# Altium PCB TripsQuad.PcbDoc
Units mil, origin at the board's own origin, x right, y up, seen from the top; angles counter-clockwise.
Board outline 2283.46 x 4370.08 mil, 2 copper layers (Top Layer, Bottom Layer); 95 components, 55 nets, 267 pads, 52 vias.
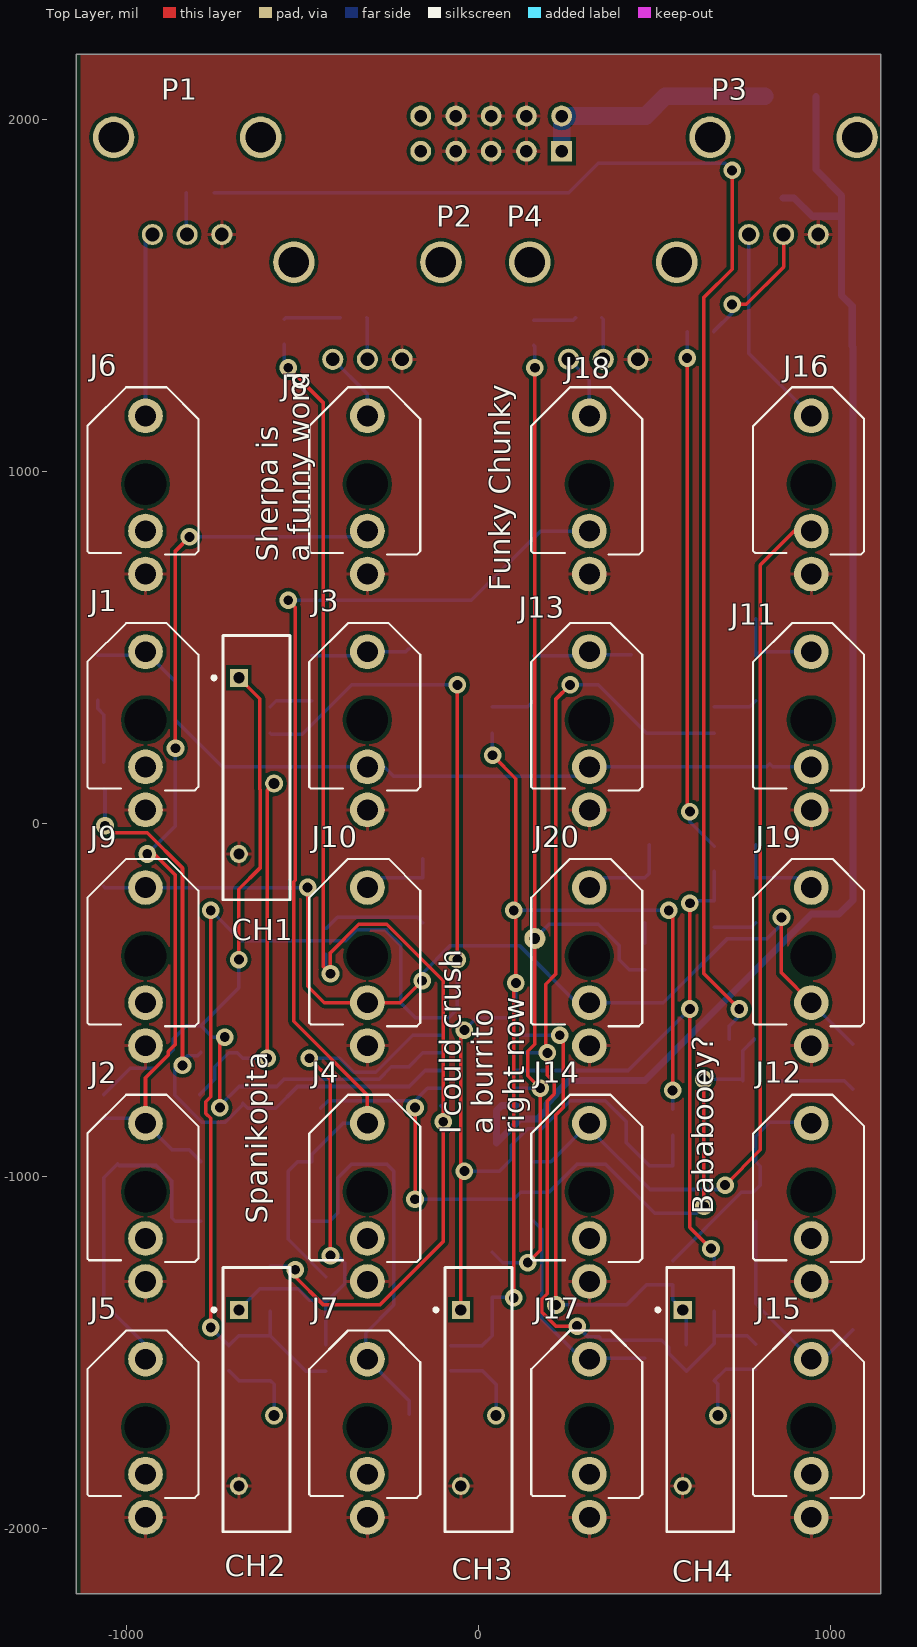
[diagram p0: Top Layer view]
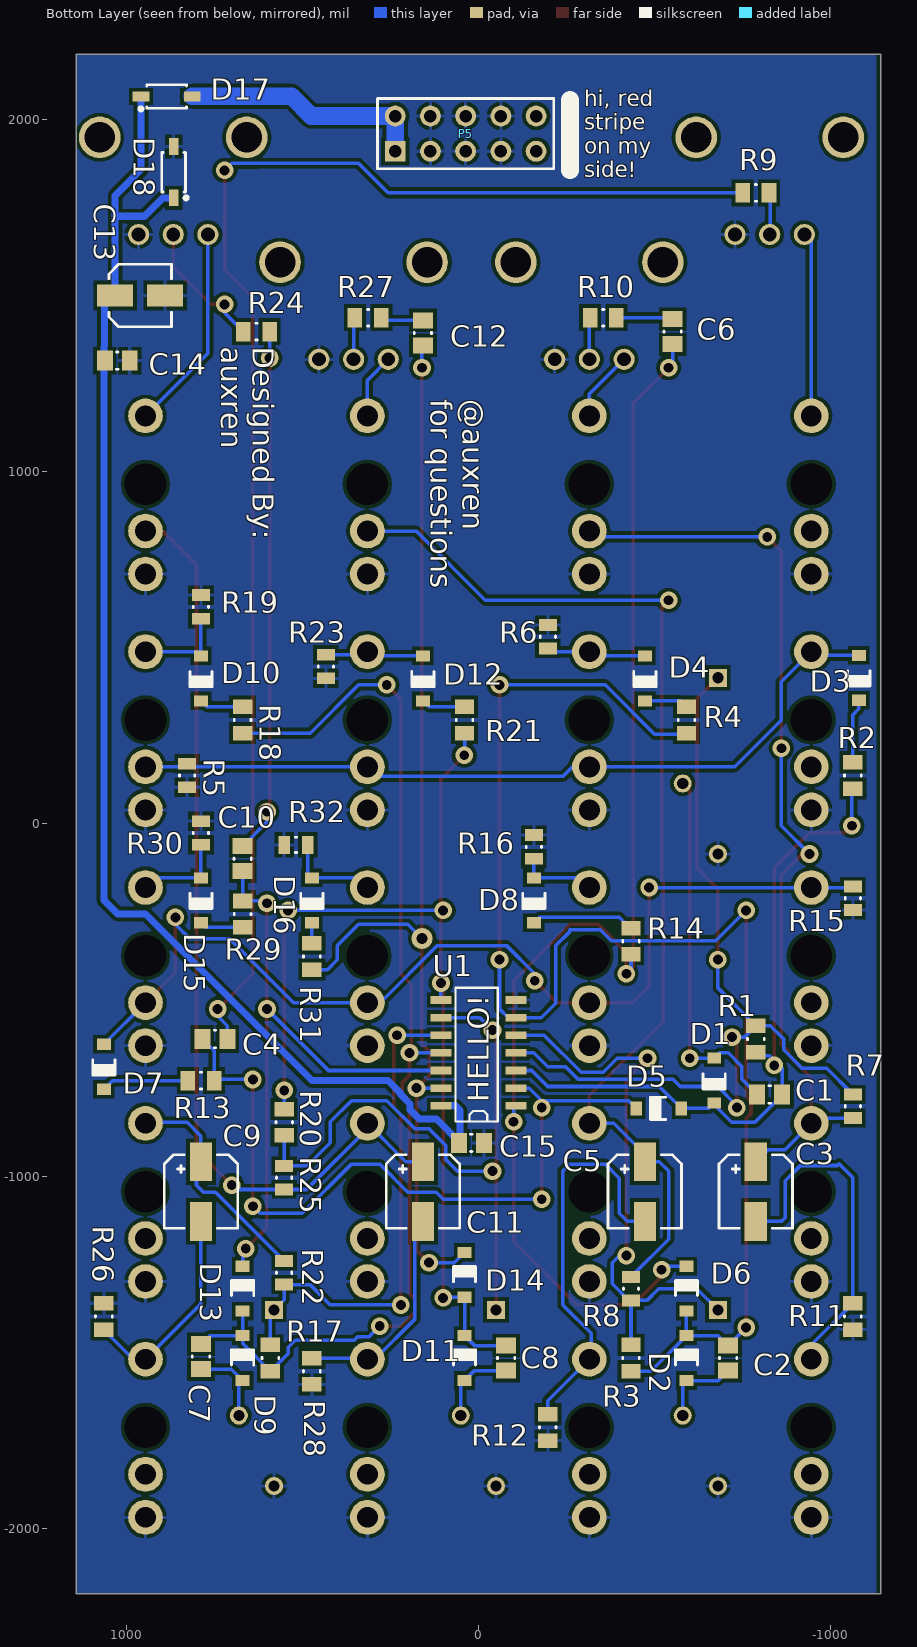
[diagram p1: Bottom Layer view, seen from below]

## Layer stack, top to bottom
Top Solder: solder mask 0.4, Solder Resist, Dk 3.5
Top Layer: signal copper 1.4
Dielectric 1: dielectric 12.6, FR-4, Dk 4.8
Bottom Layer: signal copper 1.4
Bottom Solder: solder mask 0.4, Solder Resist, Dk 3.5

## Board outline
-1141.73,-2185.04 -1141.73,2185.04 1141.73,2185.04 1141.73,-2185.04

## Design rules (kind name [scope] priority, off if disabled: settings)
Clearance [All] p1: gap=10
PolygonConnect [All] p1: connectstyle=Relief reliefconductorwidth=10 reliefentries=4 polygonreliefangle="90 Angle" airgapwidth=10
RoutingVias [All] p1: holewidth=28 width=50 viastyle="Through Hole" minholewidth=28 minwidth=50 maxholewidth=28 maxwidth=50
SolderMaskExpansion [All] p1: expansion=4
Width [All] p1: maxlimit=50 minlimit=10 preferedwidth=10
30 further rules are at their usual default settings.

## Components (designator, comment, footprint, x,y, rotation, side; value= is the part's Value field where it differs from the comment)
C1 "100pF" CAPC0805(2012)75_N -826.77,-767.72 r0 bottom
C2 "100pF" CAPC0805(2012)75_N -708.66,-1515.75 r270 bottom
C3 "47uF" PNSC-FT-V-53x53-2_V -787.4,-1043.31 r180 bottom
C4 "470nF" CAPC0805(2012)75_N 748.03,-610.24 r0 bottom
C5 "47uF" PNSC-FT-V-53x53-2_V -472.44,-1043.31 r180 bottom
C6 "470nF" CAPC0805(2012)75_N -551.18,1397.64 r270 bottom
C7 "100pF" CAPC0805(2012)75_N 787.4,-1511.81 r270 bottom
C8 "100pF" CAPC0805(2012)75_N -78.74,-1515.75 r270 bottom
C9 "47uF" PNSC-FT-V-53x53-2_V 787.4,-1043.31 r180 bottom
C10 "470nF" CAPC0805(2012)75_N 669.29,-98.43 r270 bottom
C11 "47uF" PNSC-FT-V-53x53-2_V 157.48,-1043.31 r180 bottom
C12 "470nF" CAPC0805(2012)75_N 157.48,1393.7 r270 bottom
C13 "10uF" NIC-CAPA2-4X5.8_V 960,1500 r180 bottom
C14 "100nF" CAPC0805(2012)75_N 1025,1315 r0 bottom
C15 "CAP 100nF 6.3V 0805(2012)" CAPC0805(2012)100_N 20.16,-905.04 r0 bottom
CH1 "20k" BOUR-3006P-3_V -629.84,160.04 r270 top (schematic designator VR1)
CH2 "20k" BOUR-3006P-3_V -629.92,-1633.86 r270 top (schematic designator VR2)
CH3 "20k" BOUR-3006P-3_V 0,-1633.86 r270 top (schematic designator VR4)
CH4 "20k" BOUR-3006P-3_V 629.92,-1633.86 r270 top (schematic designator VR3)
D1 "1N4148W" JSCJ-SOD-123-2_V -669.29,-728.35 r270 bottom
D2 "1N4148W" JSCJ-SOD-123-2_V -590.55,-1515.75 r90 bottom
D3 "1N4148W" JSCJ-SOD-123-2_V -1079.84,414.96 r270 bottom
D4 "1N4148W" JSCJ-SOD-123-2_V -472.44,413.39 r270 bottom
D5 "1N4148W" JSCJ-SOD-123-2_V -511.81,-807.09 r0 bottom
D6 "1N4148W" JSCJ-SOD-123-2_V -590.55,-1318.9 r90 bottom
D7 "1N4148W" JSCJ-SOD-123-2_V 1062.99,-688.98 r270 bottom
D8 "1N4148W" JSCJ-SOD-123-2_V -157.48,-216.54 r270 bottom
D9 "1N4148W" JSCJ-SOD-123-2_V 669.29,-1515.75 r90 bottom
D10 "1N4148W" JSCJ-SOD-123-2_V 787.4,413.39 r270 bottom
D11 "1N4148W" JSCJ-SOD-123-2_V 39.37,-1515.75 r90 bottom
D12 "1N4148W" JSCJ-SOD-123-2_V 157.48,413.39 r270 bottom
D13 "1N4148W" JSCJ-SOD-123-2_V 669.29,-1318.9 r90 bottom
D14 "1N4148W" JSCJ-SOD-123-2_V 39.37,-1279.53 r90 bottom
D15 "1N4148W" JSCJ-SOD-123-2_V 787.4,-216.54 r270 bottom
D16 "1N4148W" JSCJ-SOD-123-2_V 472.44,-216.54 r270 bottom
D17 "1N5819HW-7-F" DIOD-SOD-123-2_V 885,2065 r0 bottom
D18 "1N5819HW-7-F" DIOD-SOD-123-2_V 865,1850 r270 bottom
J1 "Thonkicon jack" "Thonkiconn Pot PJ301M" -944.88,295.28 r0 top
J2 "Thonkicon jack" "Thonkiconn Pot PJ301M" -944.88,-1043.31 r0 top
J3 "Thonkicon jack" "Thonkiconn Pot PJ301M" -314.96,295.28 r0 top
J4 "Thonkicon jack" "Thonkiconn Pot PJ301M" -314.96,-1043.31 r0 top
J5 "Thonkicon jack" "Thonkiconn Pot PJ301M" -944.88,-1712.6 r0 top
J6 "Thonkicon jack" "Thonkiconn Pot PJ301M" -944.88,964.57 r0 top
J7 "Thonkicon jack" "Thonkiconn Pot PJ301M" -314.96,-1712.6 r0 top
J8 "Thonkicon jack" "Thonkiconn Pot PJ301M" -314.96,964.57 r0 top
J9 "Thonkicon jack" "Thonkiconn Pot PJ301M" -944.88,-374.02 r0 top
J10 "Thonkicon jack" "Thonkiconn Pot PJ301M" -314.96,-374.02 r0 top
J11 "Thonkicon jack" "Thonkiconn Pot PJ301M" 944.88,295.28 r0 top
J12 "Thonkicon jack" "Thonkiconn Pot PJ301M" 944.88,-1043.31 r0 top
J13 "Thonkicon jack" "Thonkiconn Pot PJ301M" 314.96,295.28 r0 top
J14 "Thonkicon jack" "Thonkiconn Pot PJ301M" 314.96,-1043.31 r0 top
J15 "Thonkicon jack" "Thonkiconn Pot PJ301M" 944.88,-1712.6 r0 top
J16 "Thonkicon jack" "Thonkiconn Pot PJ301M" 944.88,964.57 r0 top
J17 "Thonkicon jack" "Thonkiconn Pot PJ301M" 314.96,-1712.6 r0 top
J18 "Thonkicon jack" "Thonkiconn Pot PJ301M" 314.96,964.57 r0 top
J19 "Thonkicon jack" "Thonkiconn Pot PJ301M" 944.88,-374.02 r0 top
J20 "Thonkicon jack" "Thonkiconn Pot PJ301M" 314.96,-374.02 r0 top
P1 "Song Huei marker Pot" SonGueiPot -826.77,1948.82 r0 top
P2 "Song Huei marker Pot" SonGueiPot -314.96,1594.49 r0 top
P3 "Song Huei marker Pot" SonGueiPot 866.14,1948.82 r0 top
P4 "Song Huei marker Pot" SonGueiPot 354.33,1594.49 r0 top
P5 "Header 5X2" HDR2X5 236.22,1909.45 r180 bottom
R1 "1M5" RESC0805(2012)_N -787.4,-610.24 r90 bottom
R2 "1M5" RESC0805(2012)_N -1062.99,137.8 r270 bottom
R3 "1M5" RESC0805(2012)_N -433.07,-1515.75 r90 bottom
R4 "1M5" RESC0805(2012)_N -590.55,295.28 r270 bottom
R5 "100K" RESC0805(2012)_L 826.77,137.8 r90 bottom
R6 "100K" RESC0805(2012)_L -196.85,531.5 r270 bottom
R7 "330R" RESC0805(2012)_L -1062.99,-801.18 r270 bottom
R8 "330R" RESC0805(2012)_L -433.07,-1318.9 r90 bottom
R9 "220K" RESC0805(2012)_N -787.4,1791.34 r0 bottom
R10 "220K" RESC0805(2012)_N -354.33,1437.01 r180 bottom
R11 "150K" RESC0805(2012)_N -1062.99,-1397.64 r90 bottom
R12 "150K" RESC0805(2012)_N -196.85,-1712.6 r90 bottom
R13 "1M5" RESC0805(2012)_N 787.4,-728.35 r180 bottom
R14 "1M5" RESC0805(2012)_N -433.07,-332.68 r270 bottom
R15 "100K" RESC0805(2012)_L -1062.99,-210.63 r90 bottom
R16 "100K" RESC0805(2012)_L -157.48,-64.96 r270 bottom
R17 "1M5" RESC0805(2012)_N 590.55,-1515.75 r90 bottom
R18 "1M5" RESC0805(2012)_N 669.29,295.28 r270 bottom
R19 "100K" RESC0805(2012)_L 787.4,616.14 r270 bottom
R20 "1M5" RESC0805(2012)_N 551.18,-846.46 r270 bottom
R21 "1M5" RESC0805(2012)_N 39.37,295.28 r270 bottom
R22 "330R" RESC0805(2012)_L 551.18,-1273.62 r90 bottom
R23 "100K" RESC0805(2012)_L 433.07,446.85 r90 bottom
R24 "220K" RESC0805(2012)_N 629.92,1397.64 r180 bottom
R25 "330R" RESC0805(2012)_L 551.18,-1003.94 r270 bottom
R26 "150K" RESC0805(2012)_N 1062.99,-1397.64 r270 bottom
R27 "220K" RESC0805(2012)_N 312.99,1437.01 r180 bottom
R28 "150K" RESC0805(2012)_N 472.44,-1553.15 r90 bottom
R29 "1M5" RESC0805(2012)_N 669.29,-255.91 r90 bottom
R30 "100K" RESC0805(2012)_L 787.4,-25.59 r270 bottom
R31 "1M5" RESC0805(2012)_N 472.44,-375.98 r270 bottom
R32 "100K" RESC0805(2012)_L 517.72,-59.06 r180 bottom
U1 "LM3900" LM3900 0,-649.61 r90 bottom

## Footprints (in the part's own frame and the unit in brackets; to place one, negate y for a bottom-side part, rotate by r counter-clockwise, add the part's x,y. Pads: shape width x height; smd on the part's side, far side on the other; paste and mask are expansions set on the pad)
BOUR-3006P-3_V [mm] "THD, 3-Leads, Body 19.05x4.83mm, Height 6.6mm"
  rect 1.3x1.3 hole 0.8: 1(-6.475,-1.27)
  round 1.3 hole 0.8: 2(1.145,1.27) 3(6.225,-1.27)
  silkscreen extent -9.53,-3.19 9.53,2.41, body extent -9.53,-2.41 11.05,2.41, height 6.6
CAPC0805(2012)75_N [mm] "Chip Capacitor, Body 2.0x1.2mm, Height 0.75mm, IPC Medium Density"
  rect 1.15x1.45 smd: 1(-0.9,0) 2(0.9,0)
  silkscreen extent -0.05,-0.62 0.05,0.63, body extent -1.1,-0.72 1.1,0.73, height 0.75
CAPC0805(2012)100_N [mm] "Chip Capacitor, Body 2.0x1.2mm, Height 1.0mm, IPC Medium Density"
  rect 1.15x1.45 smd: 1(-0.9,0) 2(0.9,0)
  silkscreen extent -0.05,-0.62 0.05,0.63, body extent -1.1,-0.72 1.1,0.73, height 1
DIOD-SOD-123-2_V [mm] "SOD-123, 2-Leads, Body 2.85x1.7mm (max), Pitch 3.7mm"
  rect 1.2x0.7 smd: 1(-1.85,0) 2(1.85,0)
  silkscreen extent -1.43,-0.85 1.97,1.02, body extent -1.42,-0.85 1.43,0.85, height 1.45
HDR2X5 [mm] "Connector; Header; 5x2 Position"
  rect 1.5x1.5 hole 0.9: 1(0,0)
  round 1.5 hole 0.9: 2(0,2.54) 3(2.54,0) 4(2.54,2.54) 5(5.08,0) 6(5.08,2.54) 7(7.62,0) 8(7.62,2.54) 9(10.16,0) 10(10.16,2.54)
  silkscreen extent -1.27,-1.27 11.43,3.81
JSCJ-SOD-123-2_V [mm] "SMD, 2-Leads, Body 2.7x1.6mm, Height 1.25mm"
  rect 0.8x1 smd: 1(-1.62,0) 2(1.62,0)
  silkscreen extent -0.5,-0.8 0.6,0.8, body extent -1.35,-0.8 1.35,0.8, height 1.25
LM3900 [mm] "LM3900 SOIC"
  rect 0.55x1.5 smd: 1(-3.81,-2.7) 2(-2.54,-2.7) 3(-1.27,-2.7) 4(0,-2.7) 5(1.27,-2.7) 6(2.54,-2.7) 7(3.81,-2.7) 8(3.81,2.7) 9(2.54,2.7) 10(1.27,2.7) 11(0,2.7) 12(-1.27,2.7) 13(-2.54,2.7) 14(-3.81,2.7)
  silkscreen extent -4.95,-1.4 4.7,1.65
NIC-CAPA2-4X5.8_V [mm] "Aluminum Electrolytic Capacitor, Diameter 4mm, Height 6.1mm, Pitch 3.6mm"
  rect 2.6x1.6 smd: 1(-1.8,0) 2(1.8,0)
  silkscreen extent -2.25,-2.25 2.25,2.25, body extent -2,-2 2,2, height 6.1
PNSC-FT-V-53x53-2_V [mm] "SMD, 2-Leads, Body 5.3x5.3mm, Height 6.1mm"
  rect 1.6x2.8 smd: 1(0,2.15) 2(0,-2.15)
  silkscreen extent -2.65,-2.65 2.65,2.65, body extent -2.65,-2.95 2.65,2.95, height 6.1
RESC0805(2012)_L [mm] "Chip Resistor, Body 2.0x1.3mm, IPC High Density"
  rect 0.85x1.3 smd: 1(-0.85,0) 2(0.85,0)
  silkscreen extent -0.05,-0.55 0.05,0.55, body extent -1.1,-0.67 1.1,0.68, height 0.7
RESC0805(2012)_N [mm] "Chip Resistor, Body 2.0x1.3mm, IPC Medium Density"
  rect 1.05x1.4 smd: 1(-0.95,0) 2(0.95,0)
  silkscreen extent -0.05,-0.6 0.05,0.6, body extent -1.1,-0.67 1.1,0.68, height 0.7
SonGueiPot [mm]
  round 3 hole 2.2: 0(-5.3,0) 0(5.3,0)
  round 1.524 hole 1: 1(-2.5,-7) 2(0,-7) 3(2.5,-7)
  body extent -6.05,-7.14 6.05,5.36, height 22.5
"Thonkiconn Pot PJ301M" [mm] "PJ301 Thonkicon Jack from Thonk"
  round 1.524 hole 3: 0(0,0)
  round 2.5 hole 1.5: 1(0,-6.48) 2(0,-3.38) 3(0,4.92)
  silkscreen extent -4.19,-5.08 3.81,6.98, body extent -4.19,-5.08 3.81,6.98, height 9

## Part data
C1 C2 C4 C6 C7 C8 C10 C12 C14: library part CMP-1036-00012-1, "CAP 0.5pF 25V ±0.1pF 0805 (2012 Metric) Thickness 0.75mm SMD"
C3 C5 C9 C11: library part CMP-0744-00003-1, "Aluminum Electrolytic Capacitor, 47 uF +/- 20%, 25 V, -55 to 105 degC, 2-Pin 5.3 x 5.3 x 6.1 mm SMD, RoHS, Tape and Reel"
C13: library part CMP-0687-00016-1, "Aluminum Electrolytic Capacitor, UD Series, Low Impedance, 10 uF, 25 V, + / - 20%, -55 to 105 degC, Chip Type, 4 x 5.8 mm D x L, Pb-Free, Reel"
C15: library part CMP-1036-04391-1, "CAP 100nF 6.3V ±10% 0805 (2012 Metric) Thickness 1mm SMD"
CH1 CH2 CH3 CH4: library part CMP-0972-00009-1, "Trimming Potentiometer, 5K Ohm +/- 10%, -55 to 125 degC, 3-Pin 19.05 x 4.83 x 6.6 mm THD, Transparent Housing, RoHS"
D1 D2 D3 D4 D5 D6 D7 D8 D9 D10 D11 D12 D13 D14 D15 D16: library part CMP-0914-00001-1, "Fast Switching Diode, 75 V, 150 mA, 2-Pin 2.7 x 1.6 x 1.25 mm SMD, Tape and Reel"
D17 D18: library part CMP-0303-00003-1, "1.0 A Surface Mount Schottky Barrier Rectifier, 40 V, -65 to 125 degC, 2-Pin SOD-123 Package, RoHS, Tape and Reel"
P5: "Header, 5-Pin, Dual row"
R1 R2 R3 R4 R13 R14 R17 R18 R20 R21 R29 R31: library part CMP-1013-00150-1, "1M5 0.125W 5% 0805 (2012 Metric)  SMD"
R5 R6 R15 R16 R19 R23 R30 R32: library part CMP-1013-00122-1, "100K 0.125W 5% 0805 (2012 Metric)  SMD"
R7 R8 R22 R25: library part CMP-1013-00062-1, "330R 0.125W 5% 0805 (2012 Metric)  SMD"
R9 R10 R24 R27: library part CMP-1013-00130-1, "220K 0.125W 5% 0805 (2012 Metric)  SMD"
R11 R12 R26 R28: library part CMP-1013-00126-1, "150K 0.125W 5% 0805 (2012 Metric)  SMD"

## Free pads (board coordinates)
  round 60 hole 30: 2(160.16,-325.04)

## Via types
v1: diameter 50, hole 28, Top Layer to Bottom Layer, tented both sides, 52 vias

## Nets (pads, with @x,y where several pads share a name; then routed paths per layer and width w, separated by ;. In a path a pad name is that pad's centre, name@x,y a point inside that pad or via, vN(x,y) a via of type N, cw(c..) or ccw(c..) an arc to the next point about the centre after c; other vN are vias at no path point)
+12V: D17.1 P5.1 P5.2 | length 699
  Bottom Layer w50: P5.1 P5.2 474.45,2009.45 530,2065 D17.1
GND: C13.2 C14.1 C15.1 CH1.3 CH2.3 CH3.3 CH4.3 D18.1 J1.1 J2.1 J3.1 J4.1 J5.1 J6.1 J7.1 J8.1 J9.1 J10.1 J11.1 J12.1 J13.1 J14.1 J15.1 J16.1 J17.1 J18.1 J19.1 J20.1 P1.3 P2.3 P3.3 P4.3 P5.3 P5.4 P5.5 P5.6 P5.7 P5.8 R5.1 R6.1 R11.1 R12.1 R15.1 R16.1 R19.1 R23.1 R26.1 R28.1 R30.1 R32.1 U1.7
NetC1_1: C1.1 D1.2 D5.1 R1.1 R2.2 U1.3 | length 1970.4
  Top Layer w10: v1(-1059.84,-5.04) -1039.84,-25.04 -939.84,-25.04 -839.84,-125.04 v1(-839.84,-685.04)
  Bottom Layer w10: R2.2 -1059.84,97.24 v1(-1059.84,-5.04) ; R1.1 -797.24,-657.48 -826.77,-657.48 -862.2,-692.91 C1.1 -862.2,-769.24 -784.99,-846.46 -718.55,-846.46 -669.29,-797.2 D1.2 -654.33,-807.09 D5.1 -513.54,-745.04 -196.34,-745.04 -150.91,-699.61 U1.3
NetC1_2: C1.2 CH1.2 D1.1 | length 1045.5
  Top Layer w10: v1(-599.84,-665.04) -599.84,94.96 CH1.2
  Bottom Layer w10: C1.2 -748.03,-724.41 -748.03,-688.98 -708.66,-649.61 -684.25,-649.61 D1.1 v1@-610.04,-664.57
NetC2_1: C2.1 D2.2 D6.1 R3.1 R4.2 U1.6 | length 4132
  Top Layer w10: v1(-759.84,-1429.13) -759.84,-835.47 -773.7,-821.61 -773.7,-788.47 -759.84,-774.61 v1(-759.84,-245.04) ; v1(-59.84,-385.04) v1(-59.84,394.96)
  Bottom Layer w10: v1(-759.84,-1429.13) C2.1 -680.31,-1451.97 D2.2 ; v1(-759.84,-245.04) -673.94,-330.94 -376.62,-330.94 -345.64,-299.96 -259.84,-299.96 ; D6.1 D2.2 ; R4.2 -587.64,254.96 -499.84,254.96 -359.84,394.96 v1(-59.84,394.96) ; R3.1 -489.37,-1553.15 D2.2 ; -259.84,-305.04 -219.84,-345.04 -219.84,-508.5 -178.74,-549.61 U1.6 -84.41,-549.61 -59.84,-525.04 v1(-59.84,-385.04)
NetC2_2: C2.2 CH2.2 D2.1 | length 233.7
  Bottom Layer w10: C2.2 -680.32,-1579.53 D2.1 -579.92,-1590.16 CH2.2
NetC3_1: C3.1 J2.3 J8.2 R7.2 | length 2633
  Top Layer w10: J2.3 -944.88,-719.94 -880.67,-655.73 -880.67,-645.87 -859.84,-625.04 -859.84,-145.04 -919.84,-85.04 v1(-939.84,-85.04) ; v1(-859.84,214.96) -859.84,774.96 v1(-819.84,814.96)
  Bottom Layer w10: R7.2 -959.84,-834.65 J2.3 -869.29,-925.2 -820.87,-925.2 C3.1 ; v1(-939.84,-85.04) -859.84,-5.04 v1(-859.84,214.96) ; v1(-819.84,814.96) -331.5,814.96 J8.2
NetC3_2: C3.2 J5.3 R11.2 | length 984.8
  Bottom Layer w10: J5.3 -944.88,-1478.35 R11.2 -1062.99,-1003.94 -1023.62,-964.57 -1018.94,-969.25 -914.21,-969.25 -870.83,-1012.63 -870.83,-1117.36 -860.24,-1127.95 C3.2
NetC4_1: C4.1 R9.2 | length 4064.4
  Top Layer w10: v1(720.16,1854.96) 720.16,1574.96 640.16,1494.96 640.16,-425.04 v1(740.16,-525.04)
  Bottom Layer w10: R9.2 256.54,1791.34 340.16,1874.96 626.61,1874.96 626.81,1874.76 688.15,1874.76 688.35,1874.96 700.16,1874.96 v1(720.16,1854.96) ; C4.1 712.6,-572.6 740.16,-545.04 v1(740.16,-525.04)
NetC4_2: C4.2 D5.2 R13.2 U1.2 | length 2156.4
  Top Layer w10: v1(-179.84,-1065.04) v1(-179.84,-805.04) ; v1(640.16,-1085.04) v1(640.16,-725.04)
  Bottom Layer w10: D5.2 -425.98,-785.04 -179.84,-785.04 -144.41,-749.61 U1.2 ; v1(-179.84,-1065.04) 100.16,-1065.04 120.16,-1045.04 200.16,-1045.04 280.16,-965.04 360.16,-965.04 500.16,-1105.04 620.16,-1105.04 v1(640.16,-1085.04) ; v1(640.16,-725.04) 746.69,-725.04 R13.2 750.24,-728.11 750.24,-643.46 C4.2
NetC5_1: C5.1 J4.3 J18.2 R8.2 | length 3155.8
  Top Layer w10: v1(-539.84,634.96) -519.84,614.96 -519.84,-159.02 -524.57,-163.75 -524.57,-560.31 -314.96,-769.92 J4.3
  Bottom Layer w10: v1(-539.84,634.96) -19.84,634.96 176.69,831.5 J18.2 ; R8.2 -539.84,-1178.66 -539.84,-985.04 -513.46,-958.66 C5.1 -472.44,-937.64 -384.41,-849.61 J4.3
NetC5_2: C5.2 J7.3 R12.2 | length 1141.2
  Bottom Layer w10: C5.2 -422.76,-1127.95 -399.84,-1105.04 -399.84,-1005.04 -359.84,-965.04 -259.84,-965.04 -239.84,-985.04 -239.84,-1365.04 -319.84,-1445.04 -319.84,-1514.02 J7.3 -196.85,-1637.01 R12.2
NetC6_1: C6.1 R10.2 | length 161.1
  Bottom Layer w10: C6.1 -547.24,1437.01 R10.2
NetC6_2: C6.2 D6.2 R14.2 U1.1 | length 3792.1
  Top Layer w10: v1(-539.84,1294.96) -439.84,1194.96 -439.84,-405.04 v1(-419.84,-425.04) -419.84,-365.04 -339.84,-285.04 -259.84,-285.04 -99.84,-445.04 v1(-99.84,-845.04) -99.84,-1185.04 -279.84,-1365.04 -439.84,-1365.04 -519.84,-1285.04 v1(-519.84,-1265.04)
  Bottom Layer w10: D6.2 -529.76,-1255.12 v1(-519.84,-1265.04) ; C6.2 -551.18,1306.3 v1(-539.84,1294.96) ; R14.2 -433.07,-411.81 v1(-419.84,-425.04) ; U1.1 -99.84,-806.06 v1(-99.84,-845.04)
NetC7_1: C7.1 D9.2 D13.1 R17.1 R18.2 U1.11 | length 3210.6
  Top Layer w10: v1(260.16,394.96) 220.16,354.96 220.16,-425.04 190.75,-454.45 190.75,-644.76 v1(195.59,-649.61) 195.59,-713.04 215.59,-733.04 215.59,-766.17 195.59,-786.17 195.59,-1333.04 180.16,-1348.47 180.16,-1385.04 220.16,-1425.04 v1(280.16,-1425.04)
  Bottom Layer w10: U1.11 v1(195.59,-649.61) ; v1(260.16,394.96) 340.16,394.96 477.24,257.87 R18.2 ; v1(280.16,-1425.04) 309.8,-1454.69 341.56,-1454.69 351.91,-1465.04 520.16,-1465.04 540.16,-1485.04 540.16,-1502.76 R17.1 669.29,-1474.41 D9.2 ; D13.1 D9.2 ; C7.1 762.99,-1451.97 D9.2
NetC7_2: C7.2 CH4.2 D9.1 | length 235.3
  Bottom Layer w10: CH4.2 679.92,-1590.16 D9.1 701.57,-1547.24 C7.2
NetC8_1: C8.1 D11.2 D14.1 R20.1 R21.2 U1.8 | length 2990.2
  Top Layer w10: v1(40.16,194.96) 106.3,128.82 v1(106.3,-451.18) 100.16,-457.32 v1(100.16,-1345.04) ; v1(540.16,-245.04) 551.18,-256.06 v1(551.18,-756.06)
  Bottom Layer w10: C8.1 11.02,-1480.32 D11.2 D14.1 98.43,-1343.31 v1(100.16,-1345.04) ; R21.2 39.37,195.75 v1(40.16,194.96) ; v1(100.16,-245.04) v1(540.16,-245.04) ; U1.8 v1(106.3,-451.18) ; R20.1 v1(551.18,-756.06)
NetC8_2: C8.2 CH3.2 D11.1 | length 233.7
  Bottom Layer w10: C8.2 11.02,-1551.18 D11.1 50,-1590.16 CH3.2
NetC9_1: C9.1 J12.3 R22.2 | length 657.7
  Bottom Layer w10: R22.2 746.3,-1045.04 780.16,-1045.04 800.16,-1025.04 800.16,-971.42 C9.1 787.4,-885.83 826.77,-846.46 941.73,-846.46 J12.3
NetC9_2: C9.2 J15.3 R26.2 | length 609
  Bottom Layer w10: C9.2 787.4,-1361.42 J15.3 979.13,-1518.9 R26.2
NetC10_1: C10.1 R24.2 | length 1492.4
  Top Layer w10: v1(592.52,1322.6) 592.52,42.6 v1(600.16,34.96)
  Bottom Layer w10: v1(592.52,1322.6) R24.2 ; v1(600.16,34.96) 600.16,6.14 C10.1
NetC10_2: C10.2 D13.2 R29.2 U1.12 | length 1772.1
  Top Layer w10: v1(600.16,-225.04) v1(600.16,-525.04) 600.16,-1145.04 v1(660.16,-1205.04)
  Bottom Layer w10: U1.12 425.59,-699.61 v1(600.16,-525.04) ; v1@606.69,-218.5 R29.2 C10.2 ; v1(660.16,-1205.04) 669.29,-1214.17 D13.2
NetC11_1: C11.1 J14.3 J16.2 R25.2 | length 2665.7
  Top Layer w10: v1(700.16,-1025.04) 800.16,-925.04 800.16,734.96 896.69,831.5 J16.2
  Bottom Layer w10: C11.1 205.91,-958.66 J14.3 314.96,-864.57 487.8,-1037.4 R25.2 687.8,-1037.4 v1(700.16,-1025.04)
NetC11_2: C11.2 J17.3 R28.2 | length 627.2
  Bottom Layer w10: C11.2 180.16,-1150.63 180.16,-1405.04 294.02,-1518.9 J17.3 318.11,-1515.75 R28.2
NetC12_1: C12.1 R27.2 | length 121.4
  Bottom Layer w10: C12.1 267.72,1429.13 R27.2
NetC12_2: C12.2 D14.2 pad.2 R31.2 U1.13 | length 3229.7
  Top Layer w10: v1(140.16,-1245.04) 175.59,-1209.61 v1(175.59,-749.61) 140.16,-714.17 140.16,-645.04 160.16,-625.04 pad.2 v1(160.16,1294.96)
  Bottom Layer w10: D14.2 68.66,-1245.04 v1(140.16,-1245.04) ; U1.13 v1(175.59,-749.61) ; C12.2 160.16,1355.59 v1(160.16,1294.96) ; pad.2 200.16,-285.04 340.16,-285.04 400.16,-345.04 400.16,-385.04 428.5,-413.39 R31.2
NetD3_1: D3.1 J1.3 J3.2 J11.2 J13.2 R5.2 | length 2258.2
  Bottom Layer w10: D3.1 -955.12,478.74 J1.3 -859.84,403.94 -859.84,294.96 -727.09,162.2 J3.2 -267.09,162.2 -239.84,134.96 287.72,134.96 J13.2 817.72,162.2 R5.2 835.83,162.2 J11.2
NetD3_2: D3.2 R2.1 | length 183
  Bottom Layer w10: D3.2 -1079.84,327.09 -1062.99,310.24 R2.1
NetD4_1: D4.1 J3.3 R6.2 | length 284.2
  Bottom Layer w10: D4.1 -326.77,477.17 J3.3 -205.91,488.98 R6.2
NetD4_2: D4.2 R4.1 | length 125.1
  Bottom Layer w10: R4.1 -573.62,349.61 D4.2
NetD7_1: D7.1 J9.3 J10.2 J19.2 J20.2 R15.2 | length 2905.9
  Top Layer w10: v1(-484.57,-180.31) -484.57,-460.31 -437.8,-507.09 J10.2 -221.89,-507.09 v1(-159.84,-445.04) ; v1(860.16,-265.04) 860.16,-422.36 J19.2
  Bottom Layer w10: R15.2 -1059.84,-180.31 J9.3 v1(-484.57,-180.31) ; v1(-159.84,-445.04) -159.84,-425.04 -79.84,-345.04 116.52,-345.04 278.57,-507.09 J20.2 524.95,-507.09 707,-325.04 820.16,-325.04 v1@860.16,-285.04 ; J19.2 D7.1
NetD7_2: D7.2 R13.1 | length 248.3
  Bottom Layer w10: R13.1 1038.58,-728.35 D7.2
NetD8_1: D8.1 J10.3 R16.2 | length 223.2
  Bottom Layer w10: J10.3 -287.4,-152.76 D8.1 R16.2
NetD8_2: D8.2 R14.1 | length 294.4
  Bottom Layer w10: R14.1 -430.08,-295.28 -399.84,-265.04 -172.76,-265.04 D8.2
NetD10_1: D10.1 J11.3 R19.2 | length 267.9
  Bottom Layer w10: R19.2 D10.1 799.21,488.98 J11.3
NetD10_2: D10.2 R18.1 | length 125.1
  Bottom Layer w10: R18.1 770.47,332.68 D10.2
NetD12_1: D12.1 J13.3 R23.2 | length 284.1
  Bottom Layer w10: D12.1 303.15,477.17 J13.3 323.62,480.31 R23.2
NetD12_2: D12.2 R21.1 | length 125.1
  Bottom Layer w10: R21.1 140.55,332.68 D12.2
NetD15_1: D15.1 J19.3 R30.2 | length 262.6
  Bottom Layer w10: R30.2 D15.1 917.32,-152.76 J19.3
NetD15_2: D15.2 R29.1 | length 123.5
  Bottom Layer w10: R29.1 774.41,-293.31 D15.2
NetD16_1: D16.1 J20.3 R32.2 | length 267.5
  Bottom Layer w10: J20.3 342.52,-152.76 D16.1 484.25,-140.94 R32.2
NetD16_2: D16.2 R31.1 | length 58.3
  Bottom Layer w10: R31.1 D16.2
NetJ6_3: J6.3 P1.1 | length 523.1
  Bottom Layer w10: J6.3 -944.88,1653.54 P1.1
NetJ8_3: J8.3 P2.1 | length 201.4
  Bottom Layer w10: P2.1 -314.96,1220.47 J8.3
NetJ16_3: J16.3 P3.1 | length 588.3
  Bottom Layer w10: P3.1 767.72,1335.43 J16.3
NetJ18_3: J18.3 P4.1 | length 185.1
  Bottom Layer w10: P4.1 314.96,1259.84 J18.3
NetP1_2: P1.2 R9.1 | length 118.9
  Bottom Layer w10: R9.1@-828.74,1791.34 -828.74,1675.2 P1.2
NetP2_2: P2.2 R10.1 | length 118.9
  Bottom Layer w10: R10.1 -314.96,1435.04 P2.2
NetP3_2: P3.2 R24.1 | length 381.4
  Top Layer w10: v1(720.16,1474.96) 760.16,1474.96 866.14,1580.94 P3.2
  Bottom Layer w10: R24.1 720.16,1450.47 v1(720.16,1474.96)
NetP4_2: P4.2 R27.1 | length 119.7
  Bottom Layer w10: R27.1 354.33,1433.07 P4.2
NetR1_2: CH1.1 R1.2 R7.1 U1.4 | length 2428.3
  Top Layer w10: v1(-733.7,-805.04) -733.7,-618.9 v1(-719.84,-605.04) ; v1(-679.84,-385.04) -679.84,-185.04 -619.84,-125.04 -619.84,97.56 -620.43,98.15 -620.43,355.55 CH1.1
  Bottom Layer w10: R7.1 -988.62,-693.35 -918.28,-693.35 -866.14,-641.2 -866.14,-610.24 -828.74,-572.83 R1.2 ; v1(-733.7,-805.04) -733.7,-799.89 -678.85,-745.04 -572.87,-745.04 -552.87,-725.04 -283.37,-725.04 -247.31,-688.98 -196.85,-688.98 -157.48,-649.61 U1.4 ; v1(-719.84,-605.04) -755.2,-605.04 R1.2 ; v1@-679.92,-394.68 -679.92,-465.35 R1.2
NetR3_2: CH2.1 R3.2 R8.1 U1.5 | length 1591.3
  Top Layer w10: v1(-479.84,-665.04) -419.84,-725.04 v1(-419.84,-1225.04)
  Bottom Layer w10: CH2.1 -619.88,-1318.9 -511.81,-1318.9 -478.35,-1352.36 R8.1 ; v1(-479.84,-665.04) -394.33,-665.04 -354.33,-705.04 -291.65,-705.04 -186.22,-599.61 U1.5 ; R3.2 R8.1 ; v1@-399.84,-1225.04 -379.84,-1245.04 -379.84,-1305.04 -427.17,-1352.36 R8.1
NetR17_2: CH4.1 R17.2 R22.1 U1.10 | length 1435.3
  Top Layer w10: v1(220.16,-1365.04) 220.16,-825.04 240.16,-805.04 v1@240.16,-605.04
  Bottom Layer w10: U1.10 v1(230.75,-599.61) ; v1(220.16,-1365.04) 420.16,-1365.04 478.11,-1307.09 R22.1 551.18,-1350.2 CH4.1 590.55,-1389.57 R17.2
NetR20_2: CH3.1 R20.2 R25.1 U1.9 | length 1854.8
  Top Layer w10: CH3.1 -50,-595.2 v1(-39.84,-585.04)
  Bottom Layer w10: v1(-39.84,-985.04) 60.16,-985.04 93.23,-951.97 93.23,-911.97 140.16,-865.04 180.16,-865.04 260.16,-785.04 360.16,-785.04 420.16,-845.04 420.16,-905.04 485.59,-970.47 R25.1 R20.2 ; v1(-39.84,-585.04) -4.41,-549.61 U1.9
VCC: C13.1 C14.2 C15.2 D17.2 D18.2 U1.14 | length 3972.7
  Bottom Layer w20: U1.14 65.59,-799.61 51.65,-813.54 51.65,-905.04 119.44,-837.25 167.94,-837.25 194.23,-810.97 194.23,-794.61 220.59,-768.25 220.59,-764.61 256.85,-728.35 472.44,-728.35 944.88,-255.91 1023.62,-255.91 1062.99,-216.54 1062.99,1354.33 1061.02,1356.3 1061.02,1469.84 C13.1 1030.87,1725 ; D18.2 896.06,1777.17 948.23,1725 1030.87,1725 ; D17.2 957.83,1857.13 1030.87,1784.09 1030.87,1725
pads on no net: J1.0 J1.2 J2.0 J2.2 J3.0 J4.0 J4.2 J5.0 J5.2 J6.0 J6.2 J7.0 J7.2 J8.0 J9.0 J9.2 J10.0 J11.0 J12.0 J12.2 J13.0 J14.0 J14.2 J15.0 J15.2 J16.0 J17.0 J17.2 J18.0 J19.0 J20.0 P1.0 P2.0 P3.0 P4.0 P5.9 P5.10

## Polygon pours and split planes (outlines as drawn)
GND on Top Layer "Bottom_GND_POUR" (solid, pour order 0): -1141.73,2185.04 1141.73,2185.04 1141.73,-2185.04 -1141.73,-2185.04
GND on Bottom Layer "Bottom_GND_POUR" (solid, pour order 2): -1141.73,2185.04 1141.73,2185.04 1141.73,-2185.04 -1141.73,-2185.04

## Silkscreen, mask and mechanical layers (free items; w line width, h text height)
Top Overlay:
  text "Sherpa is  / a funny word" at -480,745 h60 r90
  text "Funky Chunky" at 90,660 h60 r90
  text "I could crush  / a burrito / right now" at 130,-880 h60 r90
  text "Bababooey?" at 667.11,-1107.41 h60 r90
  text "Spanikopita" at -600,-1135 h60 r90
Bottom Overlay:
  lines w50: -259.84,1854.96 -259.84,2054.96
  text "hi, red / stripe / on my / side!" at -299.84,1834.96 h45
  text "Designed By: / auxren" at 730,1355 h60 r90
  text "@auxren / for questions" at 135,1205 h60 r90
GKO:
  lines w6: -1143.27,-2186.76 -1143.27,2183.32 ; -1141.73,-2185.04 1141.73,-2185.04 ; -1141.73,2185.04 1141.73,2185.04 ; 1141.73,-2186.76 1141.73,2183.32

## Text inside footprints (layer, text, board x,y; h text height)
U1: Bottom Overlay "HELLO!" at -30,-789.61 h60 r270